# EAGLE board stepper02 (EAGLE 3.55)
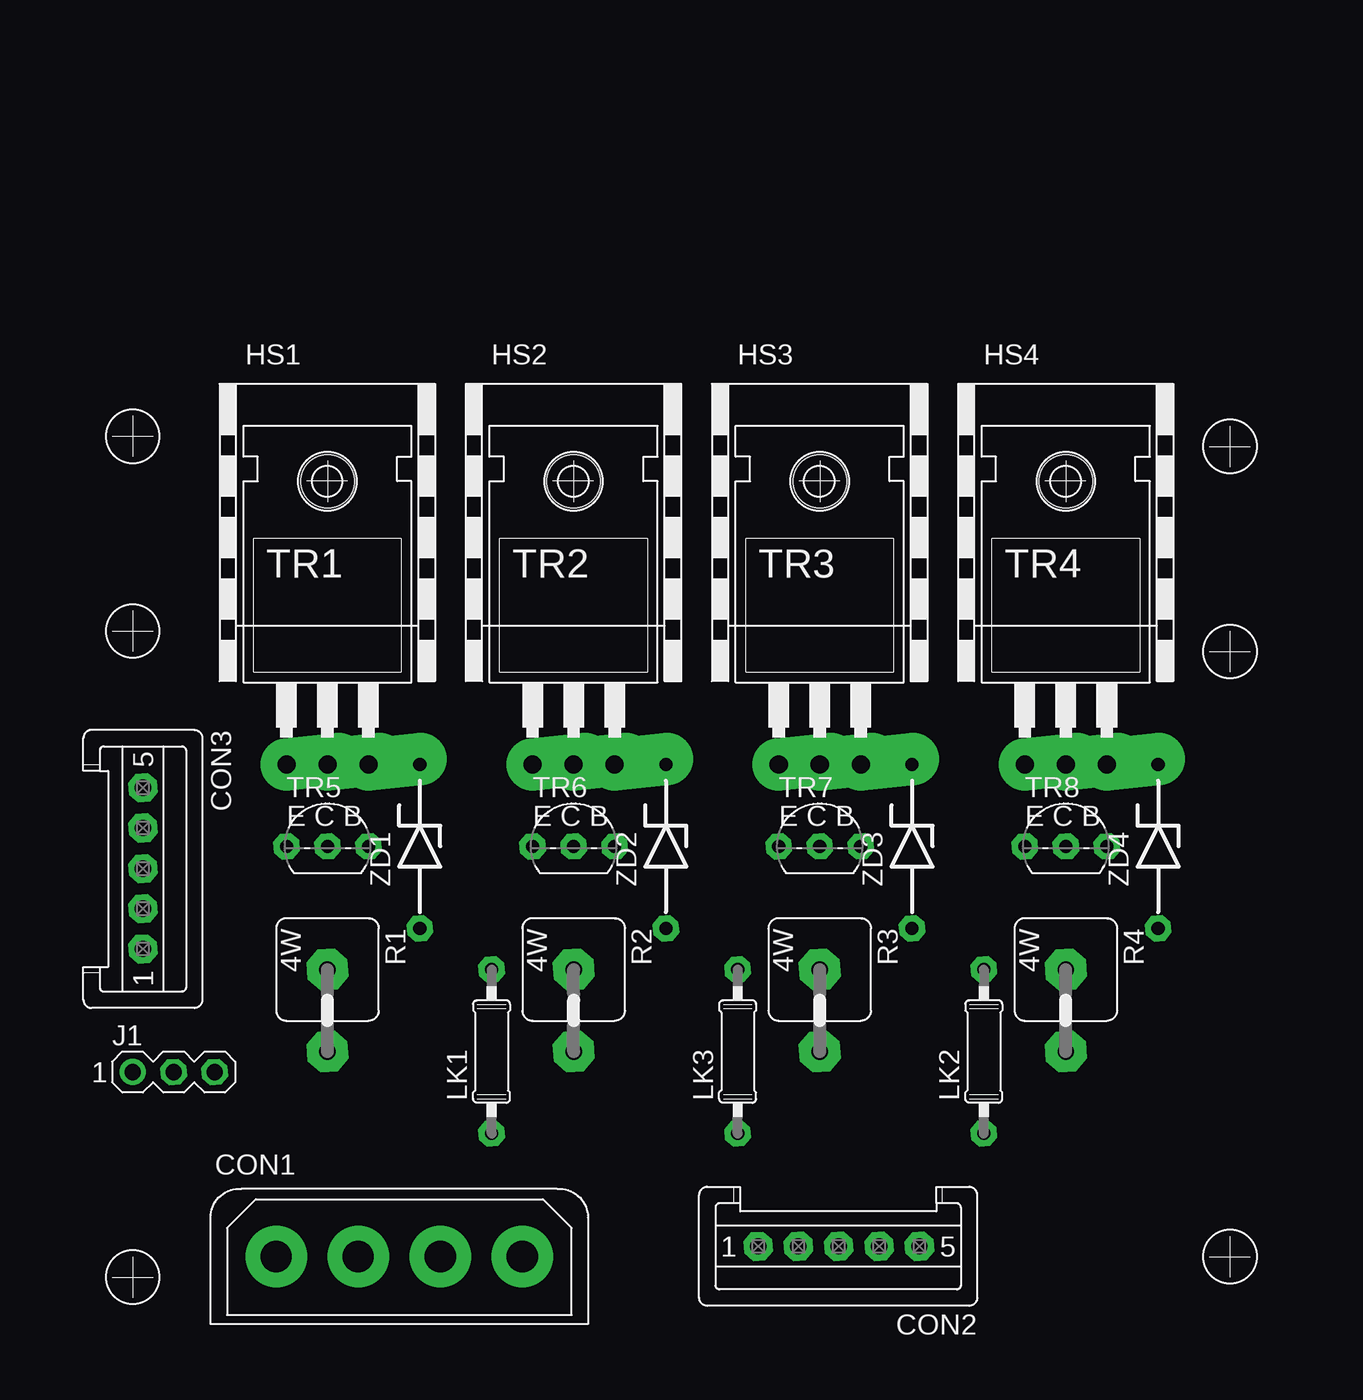
[diagram p0: board, top side]
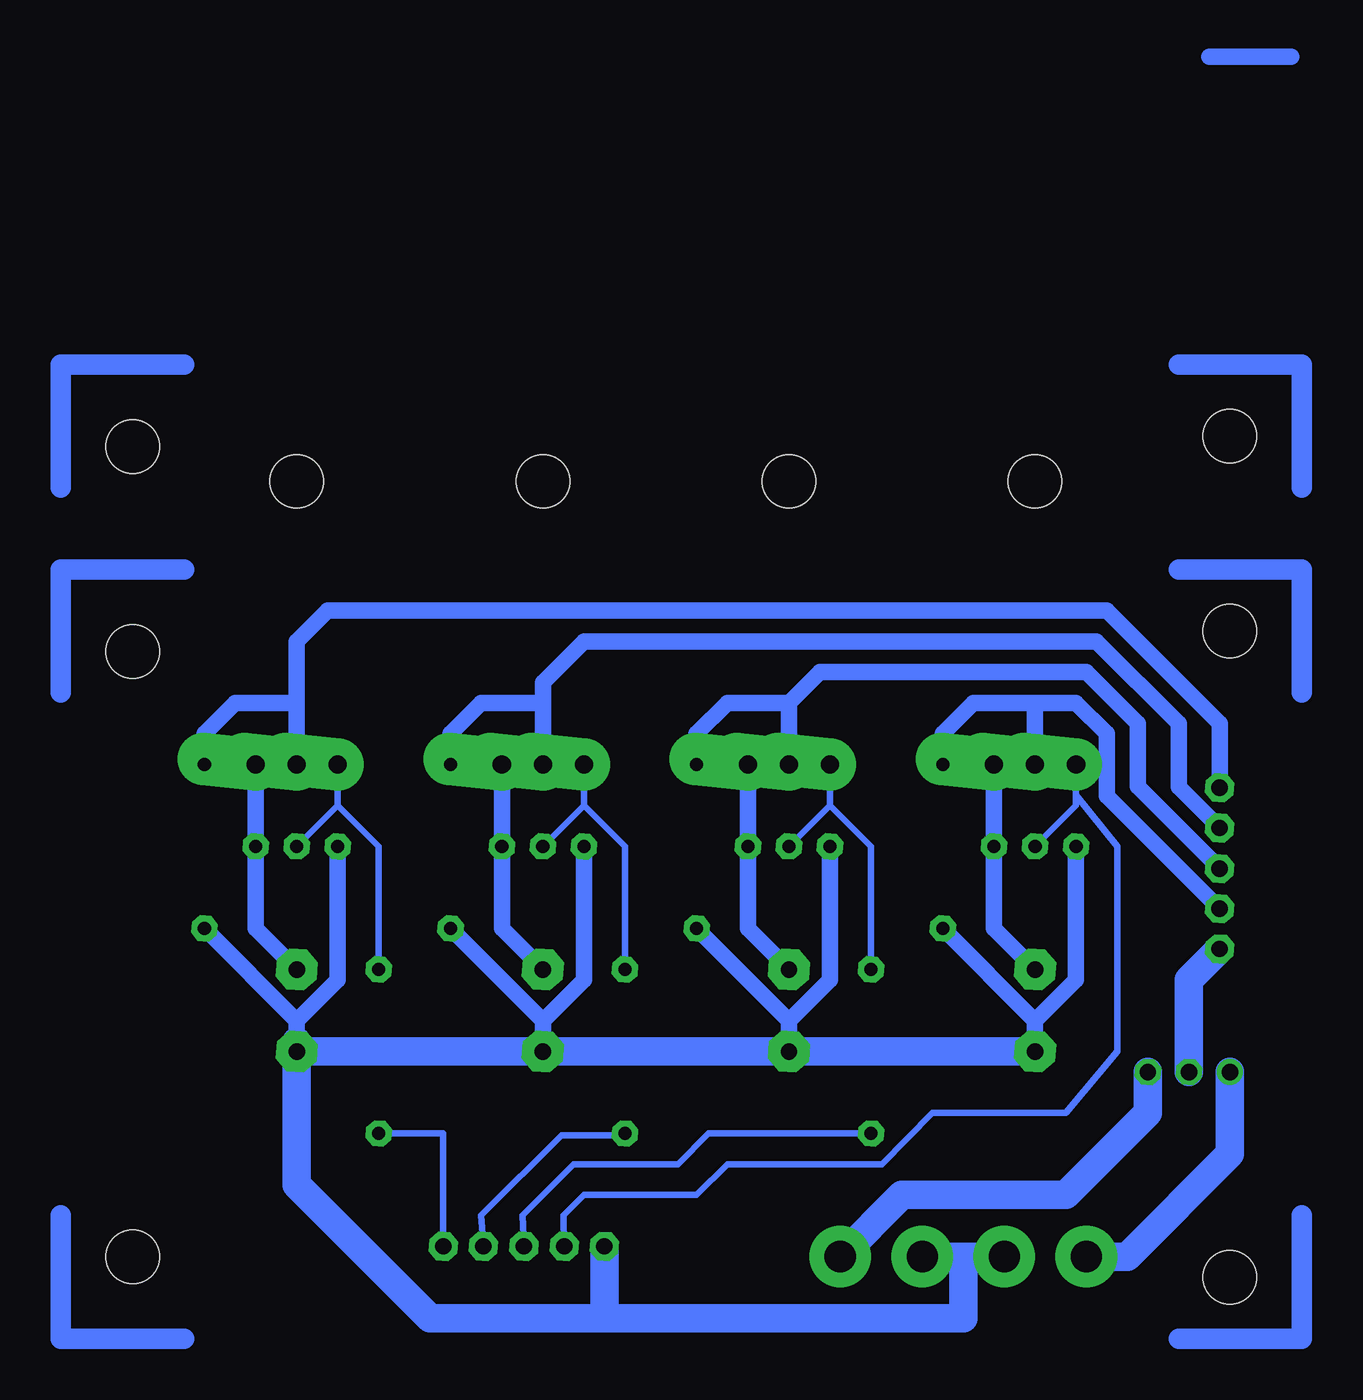
[diagram p1: board, bottom side, seen from below]

No outline drawn. Coordinates in mm, seen from the top.
Copper layers used: Bottom

## Footprints (pad centres in the part's own frame; a part is rotated, then mirrored left to right if it is on the bottom)
OPPY-4 = drill 1.93 pad 3.81 round:  7.62,0;  2.54,0;  -2.54,0;  -7.62,0
5P = drill 1.016 pad 1.778 octagon:  -4.978,0;  -9.982,0;  -7.493,0;  -2.489,0;  0,0
,3TR = hole 3.302: 0,0
03-1 = drill 1.016 pad 1.6 round:  -2.54,0 | drill 1.016 pad 1.6 octagon:  0,0;  2.54,0
07/10 = drill 0.813 pad 1.6 octagon:  -5.08,0;  5.08,0
6R = drill 1.016 pad 2.54 octagon:  -2.54,0;  2.54,0
220AL = drill 1.118 pad 3.251 offset:  -2.54,-6.35;  0,-6.35;  2.54,-6.35 | hole 3.302: 0,11.176
92- = drill 0.813 pad 1.6 octagon:  -2.54,0;  2.54,0;  0,0
IO-10 = drill 0.813 pad 1.6 octagon:  5.08,0;  -5.08,0

## Placement (x,y rotation side)
CON1  [OPPY-4]  28.57,8.26 0 top
CON2  Ctrl Input  [5P]  50.8,8.89 180 top
CON3  Stepper Output  [5P]  12.7,27.3 270 top
E$1  [1]  8.26,3.81 0 top
E$2  [1]  8.26,50.16 270 top
E$3  [1]  83.82,50.16 180 top
E$4  [1]  83.82,3.81 90 top
E$5  [,3TR]  12.06,46.99 0 top
E$6  [,3TR]  12.06,6.99 0 top
E$7  [1]  8.26,62.87 270 top
E$8  [1]  83.82,62.87 180 top
E$9  [,3TR]  12.06,59.05 0 top
E$10  [,3TR]  80.01,8.26 0 top
E$11  [,3TR]  80.01,45.72 0 top
E$12  [,3TR]  80.01,58.42 0 top
HS1  [2A-L]  24.13,50.8 270 top
HS2  [2A-L]  39.37,50.8 270 top
HS3  [2A-L]  54.61,50.8 270 top
HS4  [2A-L]  69.85,50.8 270 top
J1  5V 12V  [03-1]  14.61,19.68 0 top
LK1  OR  [07/10]  34.29,20.95 90 top
LK2  OR  [07/10]  64.77,20.95 90 top
LK3  OR  [07/10]  49.53,20.95 90 top
R1  0R68  [6R]  24.13,23.5 270 top
R2  0R68  [6R]  39.37,23.5 270 top
R3  0R68  [6R]  54.61,23.5 270 top
R4  0R68  [6R]  69.85,23.5 270 top
TR1  TIP121  [220AL]  24.13,45.09 0 top
TR2  TIP121  [220AL]  39.37,45.09 0 top
TR3  TIP121  [220AL]  54.61,45.09 0 top
TR4  TIP121  [220AL]  69.85,45.09 0 top
TR5  BC182L  [92-]  24.13,33.66 0 top
TR6  BC182L  [92-]  39.37,33.66 0 top
TR7  BC182L  [92-]  54.61,33.66 0 top
TR8  BC182L  [92-]  69.85,33.66 0 top
ZD1  BZX61  [IO-10]  29.84,33.66 90 top
ZD2  BZX61  [IO-10]  45.09,33.66 90 top
ZD3  BZX61  [IO-10]  60.33,33.66 90 top
ZD4  BZX61  [IO-10]  75.56,33.66 90 top

## Library data of the parts
CON1 = amp-nlok
CON2 CON3 = con-mt
E$1-E$4 E$7 E$8 = marks
E$5 E$6 E$9-E$12 = holes
HS1-HS4 = heatsink
J1 = con-lstb
LK1-LK3 = r
R1-R4 = r-pwr
TR1-TR4 = trans-pw
TR5-TR8 = trans-sm
ZD1-ZD4 = discrete

## Nets
S$1: CON1. CON2. R1. R2. R3. R4. TR5. TR6. TR7. TR8. ZD1. ZD2. ZD3. ZD4.
S$3: CON2. TR1. TR5.
S$4: CON3. J1.
S$5: LK3. TR3. TR7.
S$6: LK2. TR4. TR8.
S$7: R1. TR1. TR5.
S$8: R2. TR2. TR6.
S$9: R3. TR3. TR7.
S$10: R4. TR4. TR8.
S$11: CON3. TR4. ZD4.
S$12: CON3. TR3. ZD3.
S$13: CON3. TR2. ZD2.
S$14: CON3. TR1. ZD1.
S$15: LK1. TR2. TR6.
S$16: CON2. LK2.
S$17: CON2. LK3.
S$18: CON2. LK1.
S$19: CON1. J1.
S$20: CON1. J1.

## Tracks (layer width: path | path; a pad name or v marks a point on that pad's centre or on a via)
S$1
  Bottom 1.016: 67.31,33.66 67.31,25.4 69.85,22.86 | 52.07,33.66 52.07,25.4 54.61,22.86 | 69.85,22.86 ZD4. | 36.83,33.66 36.83,25.4 39.37,22.86 | R4. 69.85,22.86 | 54.61,22.86 ZD3. | 21.59,33.66 21.59,25.4 24.13,22.86 | R3. 54.61,22.86 | 39.37,22.86 ZD2. | R2. 39.37,22.86 | 24.13,22.86 ZD1. | R1. 24.13,22.86
  Bottom 1.778: 50.8,4.45 CON2. | 50.8,4.45 61.59,4.45 69.85,12.7 R4. | R4. 69.85,21.59 | R4. R3. R2. R1. | 26.04,8.26 28.57,8.26 | 31.11,8.26 28.57,8.26 | 28.57,8.26 28.57,4.45 50.8,4.45
S$2
  Bottom 1.016: 8.26,82.55 13.34,82.55
S$3
  Bottom 0.406: TR5. 21.59,36.2 21.59,36.83 | 53.29,8.89 53.34,10.79 52.07,12.06 45.09,12.06 43.18,13.97 33.6,13.97 30.48,17.14 22.23,17.14 19.05,20.95 19.05,33.66 21.59,36.83 | 21.59,36.83 21.59,38.73
S$4
  Bottom 1.778: CON3. 14.61,25.4 14.61,19.68
S$5
  Bottom 0.406: TR7. 52.07,36.2 | LK3. 49.53,33.66 52.07,36.2 | 52.07,36.2 52.07,38.73
S$6
  Bottom 0.406: 67.31,37.47 67.31,38.73 67.31,36.2 | TR8. 67.31,36.2 | LK2. 64.77,33.66 67.31,36.2
S$7
  Bottom 1.016: TR1. 26.67,33.66 26.67,28.57 24.13,26.04
S$8
  Bottom 1.016: TR2. 41.91,33.66 41.91,28.57 39.37,26.04
S$9
  Bottom 1.016: TR3. 57.15,33.66 57.15,28.57 54.61,26.04
S$10
  Bottom 1.016: TR4. 72.39,33.66 72.39,28.57 69.85,26.04
S$11
  Bottom 1.016: 12.7,37.29 12.7,41.27 19.68,48.26 67.94,48.26 69.85,46.35 69.85,42.55 | 69.85,38.73 69.85,42.55 | 69.85,42.55 73.66,42.55 75.56,40.64 75.56,38.73
S$12
  Bottom 1.016: 12.7,34.8 15.24,37.34 15.24,41.27 20.32,46.35 52.07,46.35 54.61,43.81 54.61,42.55 | 54.61,38.73 54.61,42.55 | 54.61,42.55 58.42,42.55 60.33,40.64 60.33,38.73
S$13
  Bottom 1.016: 12.7,32.28 17.78,37.36 17.78,41.27 20.95,44.45 37.47,44.45 39.37,42.55 | 39.37,38.73 39.37,42.55 | 39.37,42.55 43.18,42.55 45.09,40.64 45.09,38.73
S$14
  Bottom 1.016: 12.7,29.79 19.68,36.78 19.68,40.64 21.59,42.55 24.13,42.55 | 24.13,38.73 24.13,42.55 | 24.13,42.55 27.94,42.55 29.84,40.64 29.84,38.73
S$15
  Bottom 0.406: TR6. 36.83,36.2 | LK1. 34.29,33.66 36.83,36.2 | 36.83,36.2 36.83,38.73
S$16
  Bottom 0.406: 60.78,8.89 60.78,15.88 64.77,15.88
S$17
  Bottom 0.406: 58.29,8.89 58.42,10.79 53.47,15.75 49.53,15.75 49.53,15.88
S$18
  Bottom 0.406: 55.78,8.89 55.88,10.79 52.7,13.97 46.25,13.97 44.35,15.88 34.29,15.88
S$19
  Bottom 1.778: 12.06,19.68 12.06,14.61 18.41,8.26 CON1.
S$20
  Bottom 1.778: J1. 17.14,17.14 22.23,12.06 32.38,12.06 36.2,8.26